# Altium PCB Peripheral_Brd.PcbDoc
Units mm, origin at the board's own origin, x right, y up, seen from the top; angles counter-clockwise.
Board outline 34.25 x 16.25 mm, 2 copper layers (Top Layer, Bottom Layer); 11 components, 18 nets, 84 pads, 19 vias.
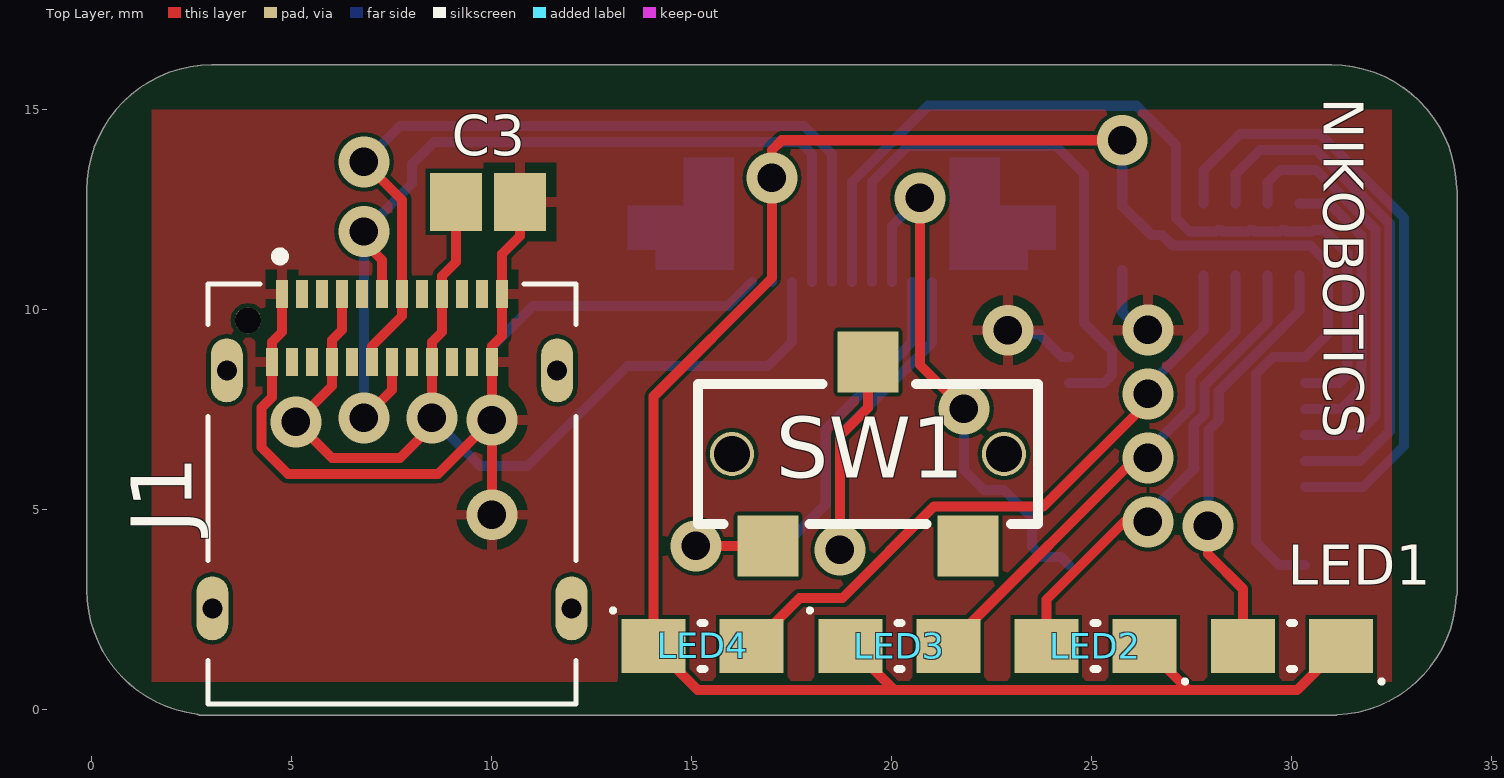
[diagram p0: Top Layer view]
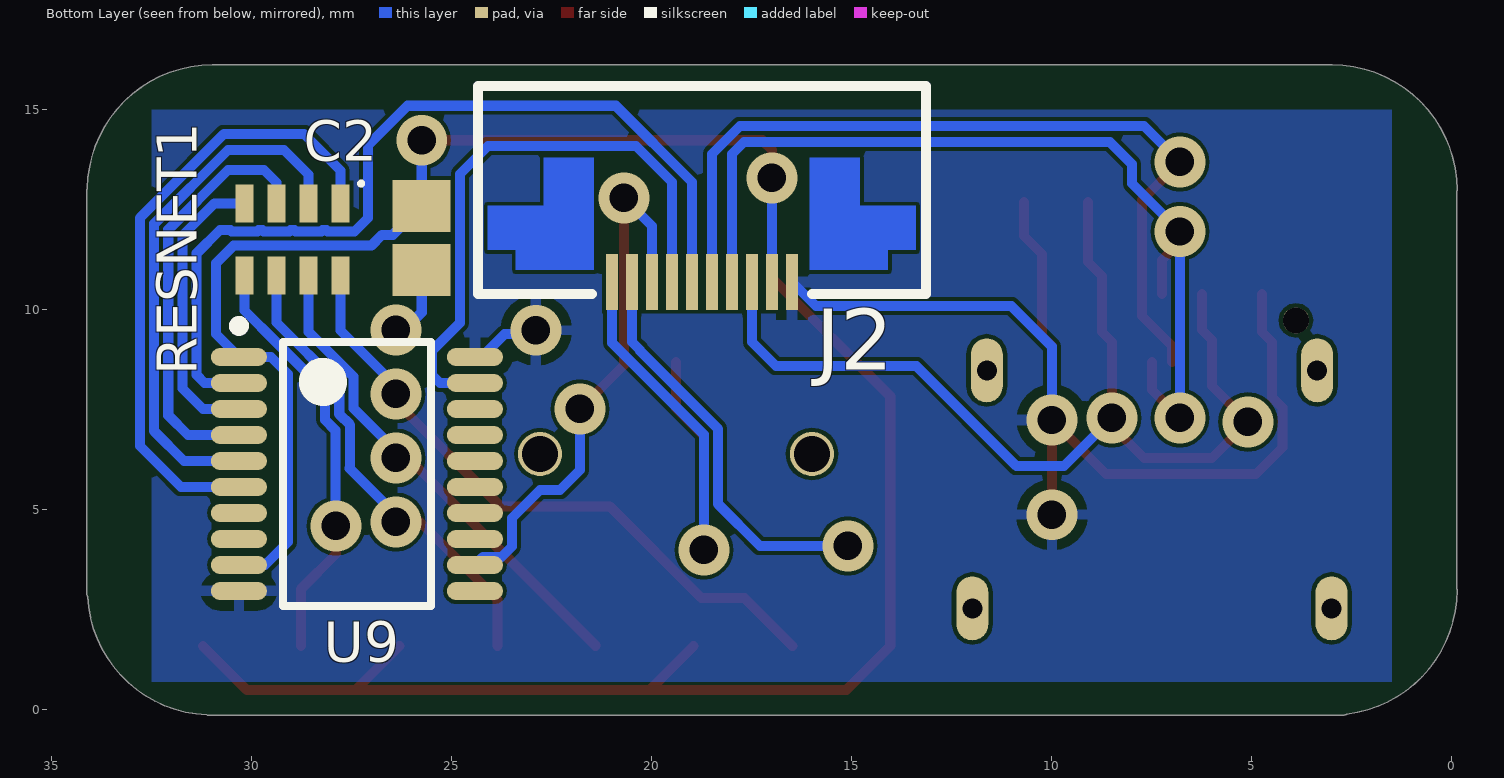
[diagram p1: Bottom Layer view, seen from below]

## Layer stack, top to bottom
Top Solder: solder mask 0.0102, Solder Resist, Dk 3.5
Top Layer: signal copper 0.0356
Dielectric 1: dielectric 0.32, FR-4, Dk 4.8
Bottom Layer: signal copper 0.0356
Bottom Solder: solder mask 0.0102, Solder Resist, Dk 3.5

## Board outline
-0.127,3 cw(c0,3) -0.125,3.022 -0.125,12.978 cw(c0,13) -0.127,13 cw(c3,13) 2.999,16.127 cw(c3,16) 3,16.127 30.988,16.127 cw(c30.988,16) 30.989,16.127 ccw(c30.988,13) 30.988,16.127 ccw(c30.988,16) 30.988,16.127 30.989,16.127 cw(c30.988,13) 34.115,13.043 cw(c34,12.988) 34.127,12.988 34.127,2.9 cw(c34,2.9) 34.111,2.838 cw(c30.988,3) 31.128,-0.124 cw(c31.1,0) 31.1,-0.127 2.7,-0.127 cw(c2.7,0) 2.628,-0.105 cw(c3,3)

## Design rules (kind name [scope] priority, off if disabled: settings)
Clearance [All] p1: gap=0.1 ignorepadtopadclearanceinfootprint=FALSE
PolygonConnect [All] p1: connectstyle=Relief reliefconductorwidth=0.254 reliefentries=4 polygonreliefangle="90 Angle" airgapwidth=0.254
RoutingVias [All] p1: holewidth=0.711 width=1.27 viastyle="Through Hole" minholewidth=0.711 minwidth=1.27 maxholewidth=0.711 maxwidth=1.27
SolderMaskExpansion [All] p1: expansion=0.102
Width [All] p1: maxlimit=0.254 minlimit=0.254 preferedwidth=0.254
30 further rules are at their usual default settings.

## Components (designator, comment, footprint, x,y, rotation, side; value= is the part's Value field where it differs from the comment)
C2 "08055C104KAJ2A" CAPC2013X140X50NL20T25 25.756,11.8 r90 bottom
C3 "08055C104KAJ2A" CAPC2013X140X50NL20T25 9.9,12.7 r180 top
J1 "12401610E4#2A" AMPHENOL_12401610E4_2A_12401610E4 7.5,9.74 r0 top
J2 "SFV10R-2STE1HLF" SVF10R-2STE1HLF 21,10.7 r0 bottom locked
LED1 "LED_GRN" DIOC3212X08N 30.003,1.6 r180 top
LED2 "LED_GRN" DIOC3212X08N 25.087,1.6 r180 top
LED3 "LED_GRN" DIOC3212X08N 20.183,1.6 r0 top
LED4 "LED_GRN" DIOC3212X08N 15.266,1.6 r0 top
RESNET1 "RESNET_180" CAC-80P320X165-8N 28.986,11.764 r270 bottom
SW1 "CL-SB-12B" CL-SB-12B 19.4,6.4 r0 top
U9 "TLC6C5912QPWRQ1" PW0020A_N 27.376,5.9 r180 bottom

## Footprints (in the part's own frame and the unit in brackets; to place one, negate y for a bottom-side part, rotate by r counter-clockwise, add the part's x,y. Pads: shape width x height; smd on the part's side, far side on the other; paste and mask are expansions set on the pad)
AMPHENOL_12401610E4_2A_12401610E4 [mm]
  rect 0.3x0.7 smd: A1(-2.75,0.66) A2(-2.25,0.66) A3(-1.75,0.66) A4(-1.25,0.66) A5(-0.75,0.66) A6(-0.25,0.66) A7(0.25,0.66) A8(0.75,0.66) A9(1.25,0.66) A10(1.75,0.66) A11(2.25,0.66) A12(2.75,0.66) B1(2.5,-1.04) B2(2,-1.04) B3(1.5,-1.04) B4(1,-1.04) B5(0.5,-1.04) B6(0,-1.04) B7(-0.5,-1.04) B8(-1,-1.04) B9(-1.5,-1.04) B10(-2,-1.04) B11(-2.5,-1.04) B12(-3,-1.04)
  round 0.65 hole 0.65 unplated: None(-3.6,0)
  oval 0.8x1.6 hole 0.5: S1(-4.13,-1.25) S2(4.13,-1.25) S3(4.49,-7.2) S4(-4.49,-7.2)
  silkscreen extent -4.6,-9.59 4.6,1.7, body extent -4.6,-9.55 4.6,1, height 3.27
CAC-80P320X165-8N [mm] "Chip Array, Concave, 8-Leads, Pitch 0.80mm,  Body 3.20x1.65mm,  IPC Medium Density"
  rect 0.95x0.45 smd: 1(-0.9,1.2) 2(-0.9,0.4) 3(-0.9,-0.4) 4(-0.9,-1.2) 5(0.9,-1.2) 6(0.9,-0.4) 7(0.9,0.4) 8(0.9,1.2)
  silkscreen extent -1.45,1.66 -1.35,1.76, body extent -0.93,-1.68 0.92,1.68, height 0.7
CAPC2013X140X50NL20T25 [mm] "Chip Capacitor, 2-Leads, Body 2.00x1.25mm, IPC Medium Density"
  rect 1.3x1.45 smd: 1(-0.8,0) 2(0.8,0)
  body extent -1.1,-0.72 1.1,0.72, height 1.4
CL-SB-12B [mm]
  rrect2% 1.524x1.524 smd: 1(0,2.3) 2(-2.5,-2.3) 3(2.5,-2.3)
  round 1.1 hole 0.9: ""(-3.4,0) ""(3.4,0)
  silkscreen extent -4.25,-1.75 4.25,1.75, body extent -4.2,-2.45 4.3,2.55, height 5.5
DIOC3212X08N [mm] "Chip Diode, 2-Leads, Body 3.20x1.20mm, IPC Medium Density"
  rect 1.6x1.35 smd: 1(-1.225,0) 2(1.225,0)
  silkscreen extent -2.29,-0.58 0.05,0.94, body extent -1.6,-0.6 1.6,0.6, height 0.8
PW0020A_N [mm] "SOP, 20-Leads, Body 6.6x4.5mm, Pitch 0.65mm, IPC Medium Density"
  oval 1.4x0.45 smd: 1(-2.95,2.925) 2(-2.95,2.275) 3(-2.95,1.625) 4(-2.95,0.975) 5(-2.95,0.325) 6(-2.95,-0.325) 7(-2.95,-0.975) 8(-2.95,-1.625) 9(-2.95,-2.275) 10(-2.95,-2.925) 11(2.95,-2.925) 12(2.95,-2.275) 13(2.95,-1.625) 14(2.95,-0.975) 15(2.95,-0.325) 16(2.95,0.325) 17(2.95,0.975) 18(2.95,1.625) 19(2.95,2.275) 20(2.95,2.925)
  silkscreen extent -3.08,-3.3 1.85,3.82, body extent -3.21,-3.25 3.21,3.25, height 1
SVF10R-2STE1HLF [mm]
  rect 0.3x1.4 smd mask+0.05: 1(-4.5,0) 2(-4,0) 3(-3.5,0) 4(-3,0) 5(-2.5,0) 6(-2,0) 7(-1.5,0) 8(-1,0) 9(-0.5,0) 10(0,0)
  Top Layer region: -4.95,-3.1 -6.2,-3.1 -6.2,-1.9 -7.6,-1.9 -7.6,-0.8 -6.9,-0.8 -6.9,-0.3 -4.95,-0.3
  Top Layer region: 0.45,-3.1 1.7,-3.1 1.7,-1.9 3.1,-1.9 3.1,-0.8 2.4,-0.8 2.4,-0.3 0.45,-0.3
  silkscreen extent -7.85,-4.9 3.35,0.3, body extent -7.5,-4.6 3,0.3, height 3.25

## Part data
C2 C3: library part CMP-2007-04765-1, Manufacturer="AVX Interconnect / Elco", Part Number=08055C104KAJ2A
J1: "Conn USB Type C Surface Mount Receptacle", Package=None, Digi-Key_Part_Number=12401610E4#2ACT-ND, Digi-Key_Purchase_URL=https://www.digikey.com/product-detail/en/amphenol-icc-commercial-products/12401610E4-2A/12401610E4-2ACT-ND/5775520?utm_source=snapeda&utm_medium=aggregator&utm_campaign=symbol, MF="Amphenol ICC", MP=12401610E4#2A, SnapEDA_Link=https://www.snapeda.com/parts/12401610E4%232A/Amphenol%20ICC/view-part/?ref=snap
RESNET1: "RES ARRAY 4 RES 180 OHM 2012", ComponentLink1Description=DigiKey, ComponentLink1URL=https://www.digikey.com/product-detail/en/cts-resistor-products/744C083681JP/744C083681JPCT-ND/
U9: library part CMP-1582-00026-1, "Automotive Power Logic 12-Bit Shift Register LED Driver, PW0020A, LARGE T&R", Operating Temperature Range(C)="-40 to 125", Part Number=TLC6C5912-Q1, Rating=Automotive, ComponentLink1Description="Manufacturer URL", ComponentLink1URL=http://www.ti.com/, ComponentLink2Description=Datasheet, ComponentLink2URL=http://www.ti.com/lit/ds/symlink/tlc6c5912-q1.pdf, DatasheetVersion=SLIS141A, ICC(uA)=130, IO(CONT)(A)=0.05, PackageReference=PW0020A, PartNumber=TLC6C5912QPWRQ1, rDS(on)(Ohms)=7.4, tPLH(ns)=210, VDS(Max)(V)=40

## Via types
v1: diameter 1.27, hole 0.711, Top Layer to Bottom Layer, 19 vias

## Nets (pads, with @x,y where several pads share a name; then routed paths per layer and width w, separated by ;. In a path a pad name is that pad's centre, name@x,y a point inside that pad or via, vN(x,y) a via of type N, cw(c..) or ccw(c..) an arc to the next point about the centre after c; other vN are vias at no path point)
5V: C2.2 J2.2 LED1.1 LED2.1 LED3.1 LED4.1 U9.1 U9.9 | length 63.3
  Top Layer w0.254: LED3.1 20.058,0.5 ; v1(25.756,14.244) 17.244,14.244 17,14 v1(17,13.3) 17,10.8 14.041,7.841 LED4.1 15.141,0.5 20.058,0.5 ; LED2.1 27.412,0.5 ; LED1.1 30.128,0.5 27.412,0.5 ; 20.058,0.5 27.412,0.5
  Bottom Layer w0.254: J2.2 v1(17,13.3) ; v1(25.756,14.244) C2.2 26.479,11.877 26.748,11.877 27.017,11.608 30.463,11.608 30.9,11.171 30.9,9.399 U9.1 29.525,8.825 29.1,8.4 29.1,4.2 29.675,3.625 U9.9
GND: C2.1 C3.1 J1.A1 J1.A12 J1.B1 J1.B12 J2.1 U9.10 U9.20 | length 30.9
  Top Layer w0.254: J1.A1 4.75,9.45 4.5,9.2 J1.B12 4.5,7.819 4.238,7.557 4.238,6.562 4.9,5.9 8.65,5.9 v1(10,7.25) ; v1(10,4.881) v1(10,7.25) ; C3.1 10.7,11.85 10.25,11.4 J1.A12 10.25,9.35 10,9.1 J1.B1 v1(10,7.25)
  Bottom Layer w0.254: v1(10,7.25) 10,9.081 11.019,10.1 15.9,10.1 J2.1 ; v1@23.368,9.4 23.681,9.4 24.256,8.825 U9.20 ; C2.1 25.756,9.944 26.2,9.5 v1(26.4,9.5)
  other v1: 22.9,9.493
LED0: RESNET1.4 U9.3 | length 7.3
  Bottom Layer w0.254: RESNET1.4 30.936,12.664 31.738,11.862 31.738,8.038 31.225,7.525 U9.3
LED1: RESNET1.3 U9.4 | length 10.6
  Bottom Layer w0.254: RESNET1.3 29.386,13.186 29.7,13.5 30.601,13.5 32.092,12.009 32.092,7.367 31.6,6.875 U9.4
LED2: RESNET1.2 U9.5 | length 13.2
  Bottom Layer w0.254: RESNET1.2 28.586,13.386 29.2,14 30.601,14 32.446,12.155 32.446,6.971 31.7,6.225 U9.5
LED3: RESNET1.1 U9.6 | length 15.7
  Bottom Layer w0.254: RESNET1.1 27.786,13.486 28.7,14.4 30.702,14.4 32.8,12.302 32.8,6.6 31.775,5.575 U9.6
LED_CLK: J2.7 U9.19 | length 14.9
  Bottom Layer w0.254: J2.7 19.5,13.199 20.401,14.1 24.1,14.1 24.8,13.4 24.8,9.681 25.5,8.981 25.5,8.374 25.301,8.175 U9.19
LED_DATA: J2.6 U9.2 | length 22.6
  Bottom Layer w0.254: J2.6 19,13.2 20.906,15.106 26.113,15.106 27.1,14.119 27.1,12.3 27.438,11.962 28.105,11.962 28.142,12 28.229,12 28.266,11.962 28.905,11.962 28.942,12 29.029,12 29.066,11.962 29.705,11.962 29.742,12 29.829,12 29.866,11.962 30.505,11.962 30.542,12 30.8,12 31.384,11.416 31.384,8.374 31.185,8.175 U9.2
LED_LOAD: J2.8 U9.12 | length 13.8
  Top Layer w0.254: v1(20.7,12.8) 20.8,12.8 20.7,12.7 20.7,8.625 v1(21.8,7.525)
  Bottom Layer w0.254: J2.8 20,12.1 v1(20.7,12.8) ; v1(21.8,7.525) 21.8,6 22.3,5.5 22.8,5.5 23.499,4.801 23.499,4.088 23.764,3.823 24.228,3.823 U9.12
NetLED1_2: LED1.2 RESNET1.5 | length 10.6
  Top Layer w0.254: v1(27.9,4.6) 27.9,3.9 28.778,3.022 LED1.2
  Bottom Layer w0.254: v1(27.9,4.6) 27.916,4.616 27.916,6.996 28.17,7.25 28.17,7.971 29.378,9.179 30.186,9.986 RESNET1.5
NetLED2_2: LED2.2 RESNET1.6 | length 11.9
  Top Layer w0.254: LED2.2 23.862,2.762 25.8,4.7 v1(26.4,4.7)
  Bottom Layer w0.254: v1(26.4,4.7) 26.4,4.881 27.562,6.043 27.546,6.059 27.546,7.126 27.816,7.396 27.816,8.117 29.386,9.687 RESNET1.6
NetLED3_2: LED3.2 RESNET1.7 | length 13.3
  Top Layer w0.254: LED3.2 21.408,1.608 26.5,6.7 26.7,6.5 26.5,6.3 v1(26.4,6.3)
  Bottom Layer w0.254: v1(26.4,6.3) 26.4,6.481 27.462,7.543 27.462,8.329 28.586,9.453 RESNET1.7
NetLED4_2: LED4.2 RESNET1.8 | length 16.3
  Top Layer w0.254: LED4.2 17.691,2.8 18.764,2.8 21.053,5.089 23.789,5.089 26.4,7.7 v1(26.4,7.9)
  Bottom Layer w0.254: v1(26.4,7.9) 26.3,8 27.786,9.486 RESNET1.8
SW+: J2.9 SW1.2 | length 11.9
  Top Layer w0.254: v1(15.1,4.1) SW1.2
  Bottom Layer w0.254: v1(15.1,4.1) 17.3,4.1 18.346,5.146 18.346,7.026 20.3,8.98 20.3,9 20.5,9.2 J2.9
SW-: J2.10 SW1.1 | length 12.6
  Top Layer w0.254: v1(18.7,4) 18.7,6.857 19.4,7.557 SW1.1
  Bottom Layer w0.254: v1(18.7,4) 18.7,6.879 21,9.179 J2.10
USB_5V: C3.2 J1.A4 J1.A9 J1.B4 J1.B9 J2.3 | length 25.9
  Top Layer w0.254: J1.A4 6.25,9.5 6,9.25 J1.B9 6,8.1 v1(5.1,7.2) 6,6.3 7.7,6.3 8.5,7.1 v1(8.5,7.3) J1.B4 8.5,9.2 8.75,9.45 J1.A9 8.75,10.85 9.1,11.2 C3.2
  Bottom Layer w0.254: v1(8.5,7.3) 9.7,6.1 10.89,6.1 13.39,8.6 16.9,8.6 17.5,9.2 J2.3
USB_DATA+: J1.A6 J1.B6 J2.4 | length 23.8
  Top Layer w0.254: v1(6.8,7.3) 7.5,8 J1.B6 ; v1(6.8,11.962) 6.8,11.7 7.25,11.25 J1.A6
  Bottom Layer w0.254: v1(6.8,7.3) v1(6.8,11.962) 8,13.162 8,13.644 8.556,14.2 17.699,14.2 18,13.899 J2.4
USB_DATA-: J1.A7 J1.B7 J2.5 | length 21.3
  Top Layer w0.254: v1(6.8,13.7) 7.75,12.75 J1.A7 7.75,9.85 7,9.1 J1.B7
  Bottom Layer w0.254: v1(6.8,13.7) 7.7,14.6 17.8,14.6 18.5,13.9 J2.5
pads on no net: J1.A2 J1.A3 J1.A5 J1.A8 J1.A10 J1.A11 J1.B2 J1.B3 J1.B5 J1.B8 J1.B10 J1.B11 J1.None J1.S1 J1.S2 J1.S3 J1.S4 SW1. SW1.3 U9.7 U9.8 U9.11 U9.13 U9.14 U9.15 U9.16 U9.17 U9.18

## Polygon pours and split planes (outlines as drawn)
GND on Top Layer "Top Layer-GND" (solid, pour order 4): 1.5,15 32.5,15 32.5,0.7 1.5,0.7
GND on Bottom Layer "Bottom Layer-GND" (solid, pour order 8): 1.5,15 32.5,15 32.5,0.7 1.5,0.7

## Silkscreen, mask and mechanical layers (free items; w line width, h text height)
Top Overlay:
  text "NIKOBOTICS" at 30.8,15.3 h1 r270
Mechanical 1:
  lines w0.254: 0,3 ccw(c3,3) 3,0 ; 0,13 cw(c3,13) 3,16 30.988,16 cw(c30.988,13) 33.988,13 ; 0.002,3 0.002,13.002 ; 2.7,0 31.1,0 ; 30.988,0 ccw(c30.988,3) 33.988,3 ; 34,2.9 34,12.988